# EAGLE board Make an automation circuit  (EAGLE 7.6.0)

Size 73.58 x 63.39 mm. Coordinates in mm from the lower left corner, seen from the top.
Outline: 0,0 56.82,0 56.82,53.33 0,53.33 0,0
Copper layers (1*16): Top 0.035mm / dielectric 1.5mm / Bottom 0.035mm
Design rules "default": minimum track width 10mil, minimum drill 24mil, track to track 8mil, track to pad 8mil, pad to pad 8mil, via to via 8mil, smd to smd 8mil, copper to edge 40mil, drill to drill 8mil, minimum pad ring 10mil, minimum via ring 8mil, stop-mask expansion 4mil, vias tented up to drill 0mil, thermal gap 10mil

## Footprints (pad centres in the part's own frame; a part is rotated, then mirrored left to right if it is on the bottom)
G6A-234P = drill 1.016 long: 1 -3.81,-3.81; 16 -3.81,3.81; O1 8.89,-3.81; O2 8.89,3.81; P1 3.81,-3.81; P2 3.81,3.81; S1 13.97,-3.81; S2 13.97,3.81
2P-2.54-65/35MIL = drill 0.889 pad 1.651 square: 1 0,1.27 | drill 0.889 pad 1.651: 2 0,-1.27
0207/10 = drill 0.813 octagon: 1 -5.08,0; 2 5.08,0
M251 = drill 0.813 long: 1 -2.54,0; 2 0,0; 3 2.54,0
ARDUINO_UNO = drill 1.016 pad 1.88: 0 63.5,50.8; 1 60.96,50.8; 2 58.42,50.8; 3 55.88,50.8; 3.3V 35.56,2.54; 4 53.34,50.8; 5 50.8,50.8; 5V 38.1,2.54; 6 48.26,50.8; 7 45.72,50.8; 8 41.656,50.8; 9 39.116,50.8; 10 36.576,50.8; 11 34.036,50.8; 12 31.496,50.8; 13 28.956,50.8; A0 50.8,2.54; A1 53.34,2.54; A2 55.88,2.54; A3 58.42,2.54; A4 60.96,2.54; A5 63.5,2.54; AREF 23.876,50.8; GND 26.416,50.8; GND. 43.18,2.54; GND.. 40.64,2.54; I/OREF 30.48,2.54; N/C 27.94,2.54; RESET 33.02,2.54; SCL 18.796,50.8; SDA 21.336,50.8; VIN 45.72,2.54 | hole 3.2: 66.04,7.62; 66.04,35.56; 15.24,50.8; 13.97,2.54

## Placement (x,y rotation side)
K1  [G6A-234P]  5,22.78 0 top
K2  [G6A-234P]  5,35.48 0 top
K3  [G6A-234P]  5,48.18 0 top
K4  [G6A-234P]  5,60.88 0 top
K6  [G6A-234P]  5,73.58 0 top  (outside the outline)
L1  [2P-2.54-65/35MIL]  5,149.78 0 top  (outside the outline)
L2  [2P-2.54-65/35MIL]  5,162.48 0 top  (outside the outline)
L3  [2P-2.54-65/35MIL]  5,175.18 0 top  (outside the outline)
L4  [2P-2.54-65/35MIL]  5,187.88 0 top  (outside the outline)
L5  [2P-2.54-65/35MIL]  5,200.58 0 top  (outside the outline)
M2  [2P-2.54-65/35MIL]  5,225.98 0 top  (outside the outline)
M3  [2P-2.54-65/35MIL]  5,264.08 0 top  (outside the outline)
R2  1k‎Ω  [0207/10]  5,86.28 0 top  (outside the outline)
R3  1k‎Ω  [0207/10]  5,98.98 0 top  (outside the outline)
R4  1k‎Ω  [0207/10]  5,111.68 0 top  (outside the outline)
R5  1k‎Ω  [0207/10]  5,124.38 0 top  (outside the outline)
R6  1k‎Ω  [0207/10]  5,137.08 0 top  (outside the outline)
R7  1k‎Ω  [0207/10]  5,251.38 0 top  (outside the outline)
S1  [M251]  5,213.28 0 top  (outside the outline)
S2  [M251]  5,238.68 0 top  (outside the outline)
U1  [ARDUINO_UNO]  5,10.08 0 top

## Library data of the parts
K1-K4 K6 L1-L5 M2 M3 R2-R7 S1 S2 U1 = AUTODESK_CIRCUITS_BREADBOARD

## Nets
N$1: K1.P2 U1.13
N$2: K2.P2 U1.12
N$3: K3.P2 U1.11
N$4: K4.P2 U1.10
N$5: K2.O2 R3.2
N$6: L1.2 R2.1
N$7: K1.O2 R2.2
N$8: L3.2 R4.1
N$9: K3.O2 R4.2
N$10: L4.2 R5.1
N$11: K4.O2 R5.2
N$12: K6.P1 R6.2
N$13: L5.2 R6.1
N$14: K6.O1 U1.9
N$15: S2.2 U1.6
N$16: L2.2 R3.1
N$17: S1.2 U1.5
N$18: K1.1 K2.1 K3.1 K4.1 K6.S2 L1.1 L2.1 L3.1 L4.1 L5.1 S2.3 U1.GND
N$19: S1.1 S2.1 U1.5V
N$20: M2.2 U1.7
N$21: M3.2 U1.8
N$22: R7.1 U1.A0
N$23: M2.1 M3.1 R7.2 S1.3 U1.GND.

## Tracks (layer width: path | path; a pad name or v marks a point on that pad's centre or on a via)
N$1  (1 unrouted)
N$2  (1 unrouted)
N$3  (1 unrouted)
N$4  (1 unrouted)
N$5  (1 unrouted)
N$6  (1 unrouted)
N$7  (1 unrouted)
N$8  (1 unrouted)
N$9  (1 unrouted)
N$10  (1 unrouted)
N$11  (1 unrouted)
N$12  (1 unrouted)
N$13  (1 unrouted)
N$14  (1 unrouted)
N$15  (1 unrouted)
N$16  (1 unrouted)
N$17  (1 unrouted)
N$18  (11 unrouted)
N$19  (2 unrouted)
N$20  (1 unrouted)
N$21  (1 unrouted)
N$22  (1 unrouted)
N$23  (4 unrouted)